# EAGLE board Side (EAGLE 6.3)
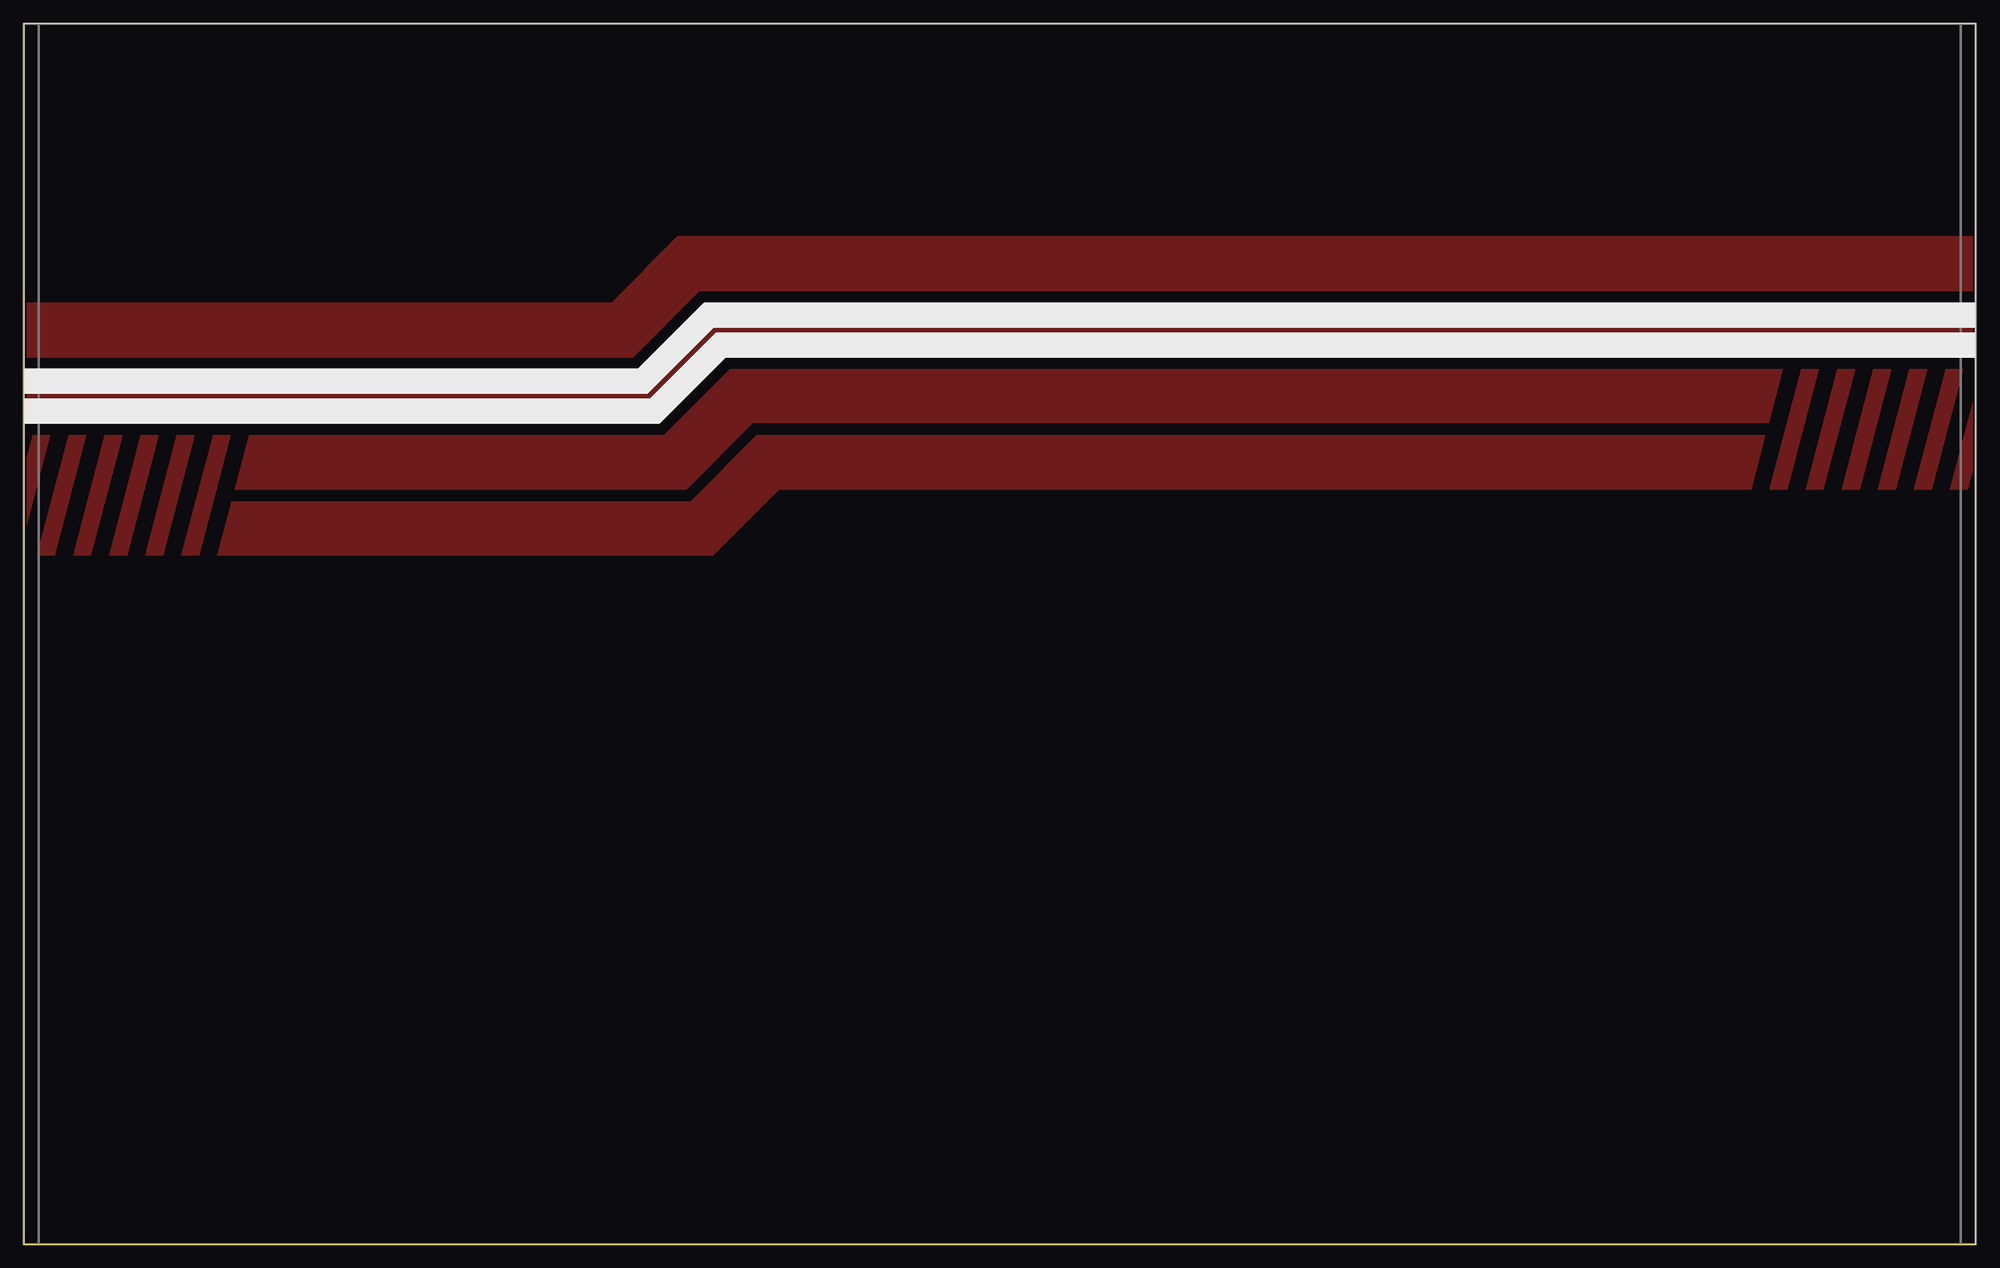
[diagram p0: board, top side]
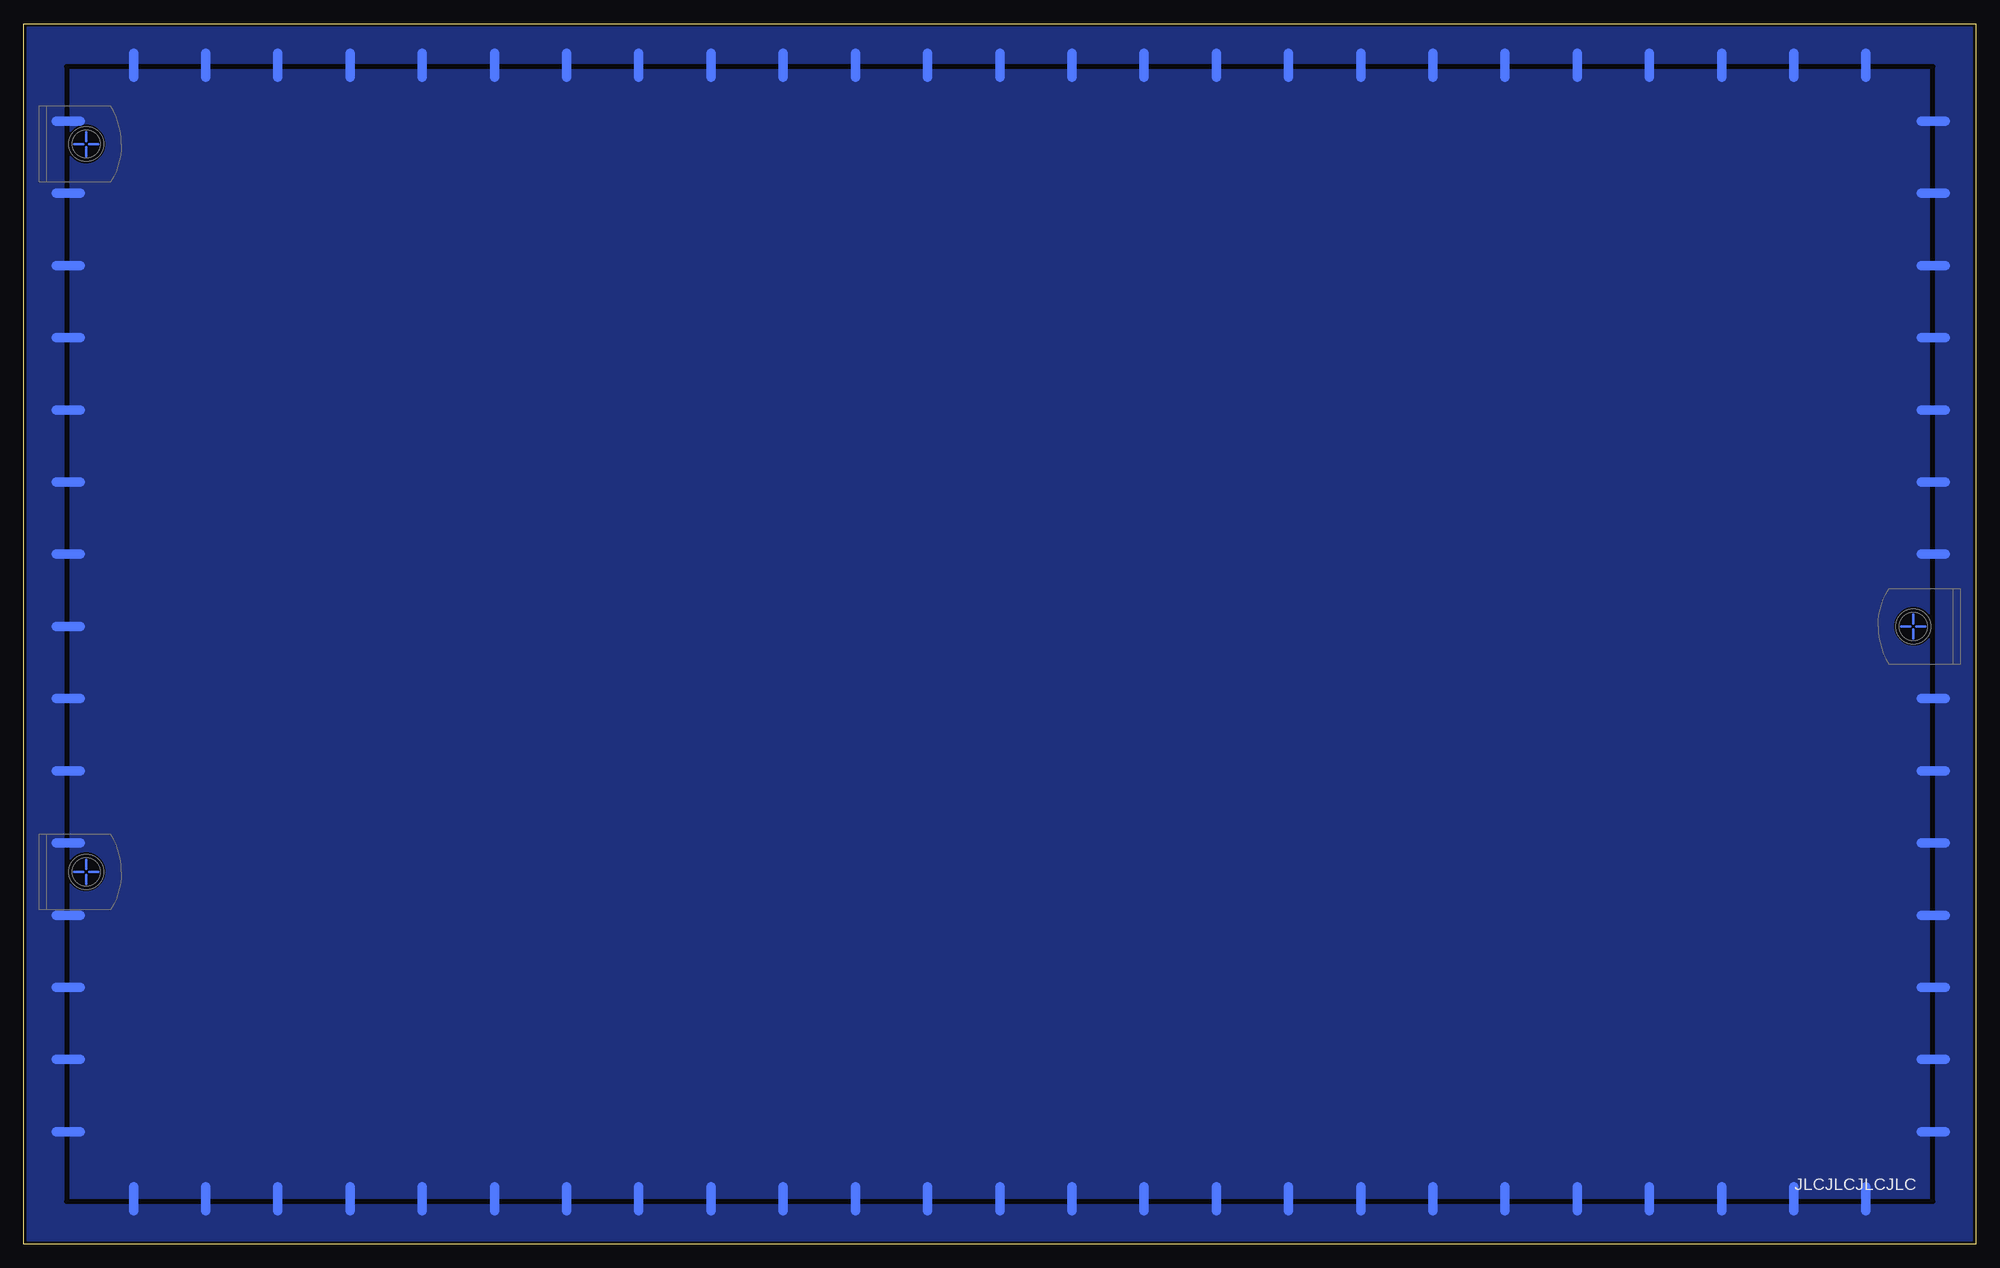
[diagram p1: board, bottom side, seen from below]

Size 206.06 x 128.84 mm. Coordinates in mm from the lower left corner, seen from the top.
Outline: 0,0 206.06,0 206.06,128.84 0,128.84 0,0
Copper layers (1*16): Top 0.035mm / dielectric 1.5mm / Bottom 0.035mm
Design rules "JLCPCB Custom": minimum track width 5mil, minimum drill 0.3mm, track to track 5mil, track to pad 8mil, pad to pad 8mil, via to via 8mil, smd to smd 5mil, copper to edge 0.3mm, drill to drill 0.3mm, minimum pad ring 10mil, minimum via ring 8mil, stop-mask expansion 0mil, vias tented up to drill 25mil, thermal gap 10mil
tRestrict: area -2.9,72.4 to 0,80.6; area 206.1,84.1 to 208.9,92.7
bRestrict: area 4.6,63.2 to 8.6,67.2; area 197.4,114.1 to 201.5,118.2; area 197.4,37.3 to 201.5,41.3; 4 lines

## Placement (x,y rotation side)
E$13  [614-TN]  1.59,65.21 90 bottom
E$36  [614-TN]  204.47,116.14 270 bottom
E$37  [614-TN]  204.47,39.31 270 bottom

## Library data of the parts
E$13 E$36 E$37 = panel

## Tracks (layer width: path | path; a pad name or v marks a point on that pad's centre or on a via)
S$56
  pour Top: 206.06,106.35 69.02,106.35 62.04,99.36 0,99.36 0,93.65 64.33,93.65 71.31,100.63 206.06,100.63
  pour Top: 206.06,99.36 71.82,99.36 64.83,92.38 0,92.38 0,86.66 67.12,86.66 74.1,93.65 206.06,93.65
S$57
  pour Top: 0.98,85.39 2.76,85.39 -0.58,72.69 -2.36,72.69
S$58
  pour Top: 4.79,85.39 6.57,85.39 3.23,72.69 1.45,72.69
S$60
  pour Top: 8.6,85.39 10.38,85.39 7.04,72.69 5.26,72.69
S$61
  pour Top: 12.41,85.39 14.19,85.39 10.85,72.69 9.07,72.69
S$62
  pour Top: 16.22,85.39 18,85.39 14.66,72.69 12.88,72.69
S$63
  pour Top: 20.03,85.39 21.81,85.39 18.47,72.69 16.69,72.69
S$64
  pour Top: 206.72,92.38 208.5,92.38 205.16,79.68 203.38,79.68
S$65
  pour Top: 202.91,92.38 204.69,92.38 201.35,79.68 199.57,79.68
S$66
  pour Top: 199.1,92.38 200.88,92.38 197.54,79.68 195.76,79.68
S$67
  pour Top: 195.29,92.38 197.07,92.38 193.73,79.68 191.95,79.68
S$68
  pour Top: 191.48,92.38 193.26,92.38 189.92,79.68 188.14,79.68
S$69
  pour Top: 187.67,92.38 189.45,92.38 186.11,79.68 184.33,79.68
S$70
  pour Top: 22,78.41 70.42,78.41 77.41,85.39 183.8,85.39 182.3,79.68 79.69,79.68 72.71,72.69 20.5,72.69
  pour Top: 23.84,85.39 67.63,85.39 74.61,92.38 185.64,92.38 184.14,86.66 76.9,86.66 69.91,79.68 22.35,79.68
S$80
  Bottom 1.016: 171.61,6.04 171.61,3.5 | 179.23,6.04 179.23,3.5 | 186.85,6.04 186.85,3.5 | 148.75,6.04 148.75,3.5 | 156.37,6.04 156.37,3.5 | 163.99,6.04 163.99,3.5 | 125.89,6.04 125.89,3.5 | 133.51,6.04 133.51,3.5 | 141.13,6.04 141.13,3.5 | 194.47,6.04 194.47,3.5 | 103.03,6.04 103.03,3.5 | 110.65,6.04 110.65,3.5 | 118.27,6.04 118.27,3.5 | 80.17,6.04 80.17,3.5 | 87.79,6.04 87.79,3.5 | 95.41,6.04 95.41,3.5 | 57.31,6.04 57.31,3.5 | 64.93,6.04 64.93,3.5 | 72.55,6.04 72.55,3.5 | 34.45,6.04 34.45,3.5 | 42.07,6.04 42.07,3.5 | 49.69,6.04 49.69,3.5 | 11.59,6.04 11.59,3.5 | 19.21,6.04 19.21,3.5 | 26.83,6.04 26.83,3.5 | 3.23,110.93 5.78,110.93 | 3.23,118.55 5.78,118.55 | 3.23,88.07 5.78,88.07 | 3.23,95.69 5.78,95.69 | 3.23,103.31 5.78,103.31 | 3.23,72.83 5.78,72.83 | 3.23,80.45 5.78,80.45 | 3.23,42.35 5.78,42.35 | 3.23,49.97 5.78,49.97 | 3.23,57.59 5.78,57.59 | 3.23,19.49 5.78,19.49 | 3.23,27.11 5.78,27.11 | 3.23,34.73 5.78,34.73 | 3.23,11.87 5.78,11.87 | 171.61,125.71 171.61,123.17 | 179.23,125.71 179.23,123.17 | 186.85,125.71 186.85,123.17 | 148.75,125.71 148.75,123.17 | 156.37,125.71 156.37,123.17 | 163.99,125.71 163.99,123.17 | 125.89,125.71 125.89,123.17 | 133.51,125.71 133.51,123.17 | 141.13,125.71 141.13,123.17 | 194.47,125.71 194.47,123.17 | 103.03,125.71 103.03,123.17 | 110.65,125.71 110.65,123.17 | 118.27,125.71 118.27,123.17 | 80.17,125.71 80.17,123.17 | 87.79,125.71 87.79,123.17 | 95.41,125.71 95.41,123.17 | 57.31,125.71 57.31,123.17 | 64.93,125.71 64.93,123.17 | 72.55,125.71 72.55,123.17 | 34.45,125.71 34.45,123.17 | 42.07,125.71 42.07,123.17 | 49.69,125.71 49.69,123.17 | 11.59,125.71 11.59,123.17 | 19.21,125.71 19.21,123.17 | 26.83,125.71 26.83,123.17 | 200.07,110.93 202.61,110.93
  Bottom 1.016: 200.07,118.55 202.61,118.55 | 200.07,88.07 202.61,88.07 | 200.07,95.69 202.61,95.69 | 200.07,103.31 202.61,103.31 | 200.07,65.21 202.61,65.21 | 200.07,72.83 202.61,72.83 | 200.07,80.45 202.61,80.45 | 200.07,42.35 202.61,42.35 | 200.07,49.97 202.61,49.97 | 200.07,57.59 202.61,57.59 | 200.07,19.49 202.61,19.49 | 200.07,27.11 202.61,27.11 | 200.07,34.73 202.61,34.73 | 200.07,11.87 202.61,11.87
  pour Bottom: 0.43,128.41 205.63,128.41 205.63,0.43 0.43,0.43
S$115
  Bottom 0.254: 7.86,65.21 6.91,65.21
S$116
  Bottom 0.254: 5.32,65.21 6.27,65.21
S$117
  Bottom 0.254: 6.59,66.48 6.59,65.53
S$118
  Bottom 0.254: 6.59,63.94 6.59,64.89
S$193
  Bottom 0.254: 198.2,116.14 199.15,116.14
S$194
  Bottom 0.254: 200.74,116.14 199.78,116.14
S$195
  Bottom 0.254: 199.47,114.87 199.47,115.82
S$196
  Bottom 0.254: 199.47,117.41 199.47,116.46
S$197
  Bottom 0.254: 198.2,39.31 199.15,39.31
S$198
  Bottom 0.254: 200.74,39.31 199.78,39.31
S$199
  Bottom 0.254: 199.47,38.04 199.47,38.99
S$200
  Bottom 0.254: 199.47,40.58 199.47,39.62

## Text on the board
bPlace: JLCJLCJLCJLC